# Altium PCB ESE516_PCB.PcbDoc (part 2 of 2)
Units mil, origin at the board's own origin, x right, y up, seen from the top; angles counter-clockwise.
Board outline 3149.61 x 3149.61 mil, 4 copper layers (Top Layer, GroundPlane, PowerPlane, Bottom Layer), stack 58.4 mil thick; 100 components, 68 nets, 304 pads, 8 vias.
Unrouted connection lines stored in the file: 178.
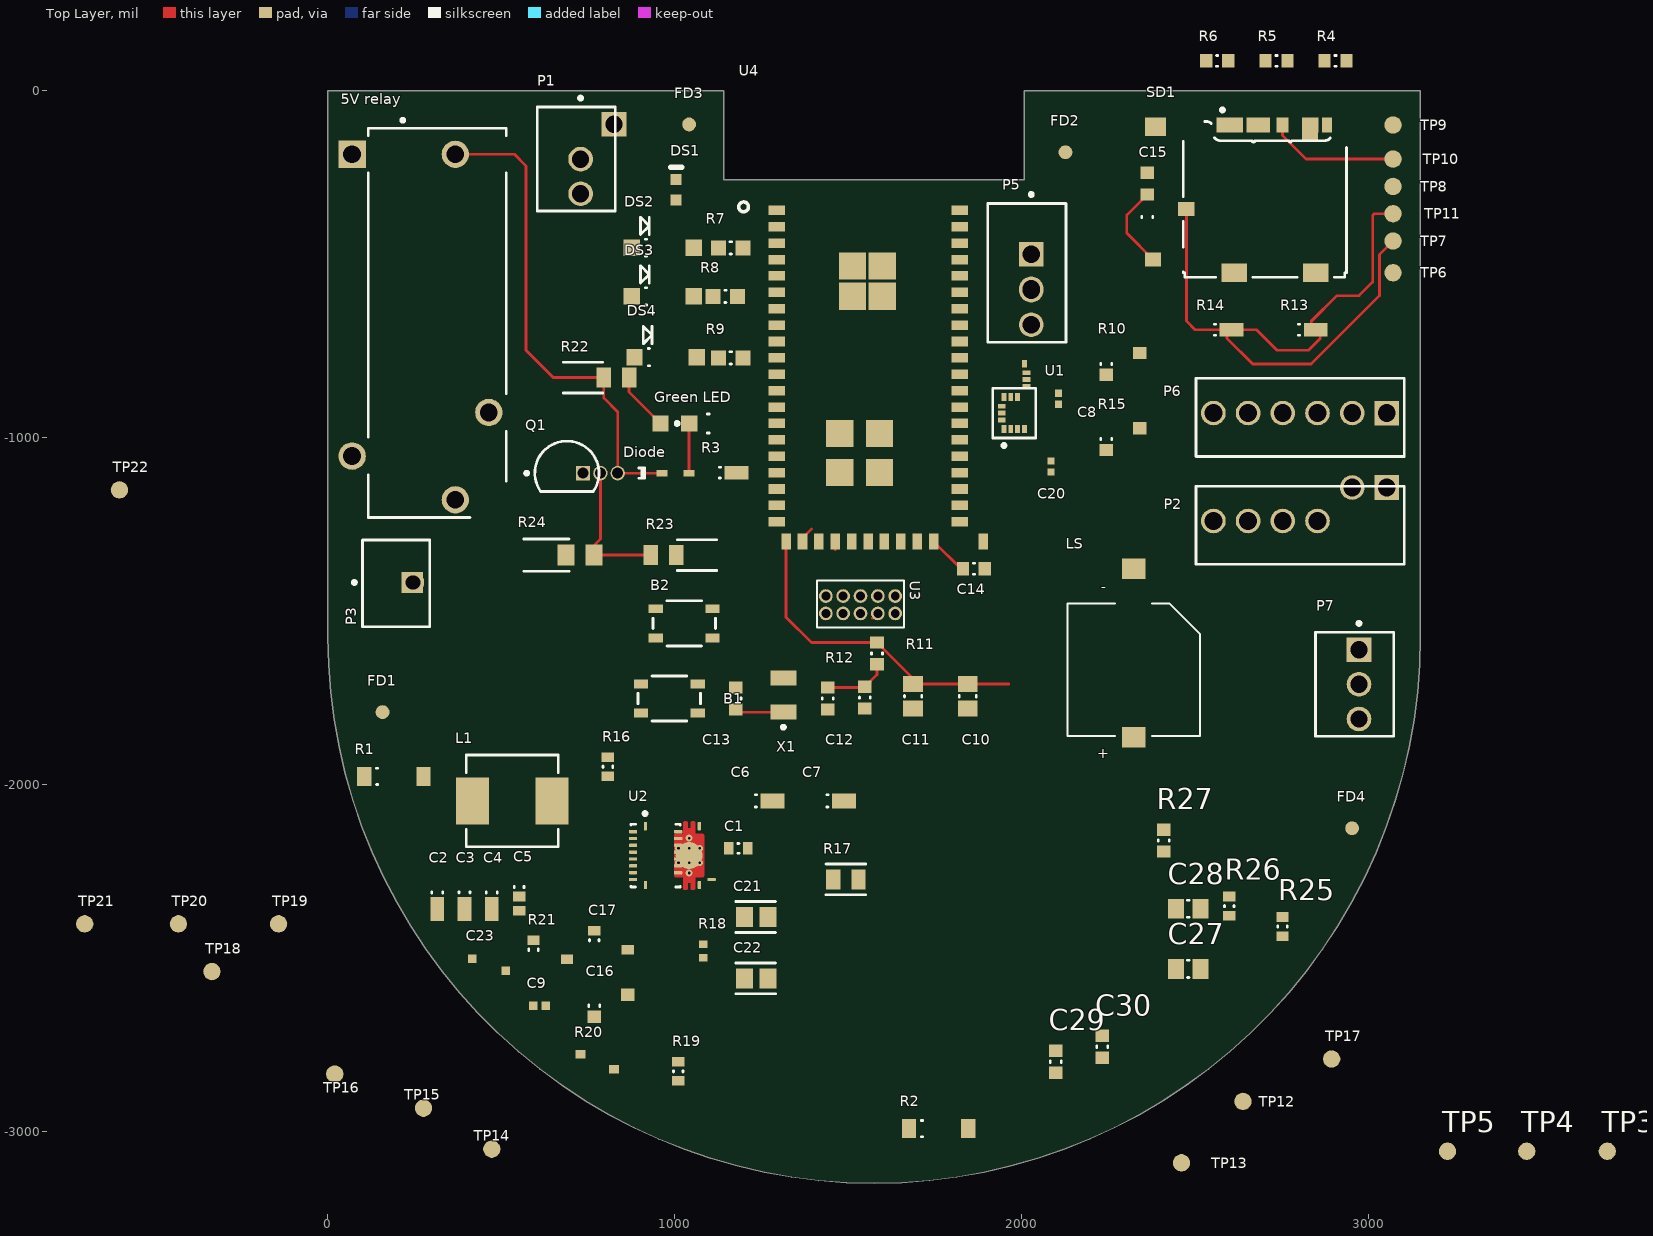
[diagram p0: Top Layer view]

## Part data (continued)
X1: library part CMP-0447-00001-2, "Crystal, 32.768 kHz, 12.5 pF, -40 to 85 degC, SMD Low Profile 3.2 x 1.5 x 0.9 mm, Tape and Reel", Equivalent Series Resistance (R1)="70 Kohm", Frequency="32.768 kHz", Frequency Tolerance @+25degC="+/- 20 ppm", Insulation Resistance (Min)="500 Mohm", Load Capacitance (CL)="12.5 pF", Manufacturer=Abracon, Operating Temperature="-40 to 85 degC", Q Value (Type)=30000, Shunt Capacitance (C0)="0.9 to 1.2 pF", ComponentLink1Description="Manufacturer URL", ComponentLink1URL=http://www.abracon.com/, ComponentLink2Description=Datasheet, ComponentLink2URL=http://www.abracon.com/Resonators/ABS07.pdf, ComponentLink3Description="Package Specification", ComponentLink3URL=http://www.abracon.com/Resonators/ABS07.pdf, DatasheetVersion=04.03.13, Drive Level (Type)="0.1 uW", Mounting Technology="Surface Mount", Operation Mode="Flexural Mode (Tuning Fork)", PackageDescription="2-Pin Hand Drawn, Body 3.2x1.5mm, Pitch 2.5mm", PackageReference=ABS07-2, Packing="Tape and Reel", PartNumber=ABS07-32.768KHz-T

## Via types
v1: diameter 19.68, hole 7.87, Top Layer to Bottom Layer, 8 vias

## Nets (pads, with @x,y where several pads share a name; then routed paths per layer and width w, separated by ;. In a path a pad name is that pad's centre, name@x,y a point inside that pad or via, vN(x,y) a via of type N, cw(c..) or ccw(c..) an arc to the next point about the centre after c; other vN are vias at no path point)
3V3: "5V relay.A1" "Green LED.2" C8.1 C15.2 C20.1 Diode.1 P2.1 P5.2 R1.2 R3.1 R10.2 R13.2 R14.2 R15.2 SD1.4 TP4.1 TP6.1 U1.5 U1.8 | length 447.1
  Top Layer w8: Diode.1 1041.31,-959.02 ; R14.2 2677.17,-688.98 2736.22,-748.03 2826.45,-748.03 2860.85,-713.63 2860.85,-692.69 R13.2
12V: P3.2 R2.2 TP5.1
Battery_Status_LED: U4.36
Buzzer_GPIO: LS.P TP19.1 U4.22 | length 46.3
  Top Layer w8: U4.22 1368.14,-1289.37 1393.92,-1263.59
Camera_SERCOM3_UART_RX: P2.3 U4.14
Camera_SERCOM3_UART_TX: P2.4 U4.15
Device_Status_LED: U4.27
EP1: P7.1 U4.41
EP2: P7.2 U4.40
EP3: P7.3 U4.35
EP4: P6.1 U4.34
EP5: P6.2 U4.28
EP6: P6.3 U4.23
EP7: P6.4 U4.19
EP8: P6.5 U4.18
EP9: P6.6 U4.13
Extra_Button_GPIO: TP22.1 U4.9
FB_TPS62: R25.1 R27.2 TP17.1
FLASH_MEM_SPI_SS: R13.1 SD1.2 TP11.1 U4.37 | length 503.2
  Top Layer w8: R13.1 2834.85,-685.26 2834.85,-664.32 2908.62,-590.55 2972.44,-590.55 3011.81,-551.18 3011.81,-359.02 3016.5,-354.33 TP11.1
GND: "5V relay.11" B1.3 B1.4 C2.1 C3.1 C4.1 C5.1 C6.1 C7.1 C8.2 C10.1 C11.1 C12.1 C13.1 C14.1 C15.1 C16.2 C17.1 C20.2 C21.2 C22.2 C23.1 C27.1 C28.1 C30.1 DS2.2 DS3.2 DS4.2 LS.N P1.1 P2.2 P5.1 Q1.1 R20.1 R21.1 R24.1 R27.1 SD1.6 SD1.10 SD1.11 SD1.12 TP3.1 TP13.1 U1.6 U1.7 U2.11 U2.12 U2.20 U2.21 U3.3 U3.5 U3.9 U4.0 U4.1 U4.10 U4.17 U4.20 U4.32 U4.42 U4.51 | length 242.7
  Top Layer w8: C15.1 2303.15,-358.27 2303.15,-410.79 SD1.10
  other v1: 1041.31,-2254.92 1010.79,-2225.39 1041.31,-2225.39 1071.82,-2225.39 1010.79,-2184.06 1041.31,-2184.06 1071.82,-2184.06 1041.31,-2154.53
IMU_I2C_SCL: P5.3 R15.1 TP20.1 U1.13 U4.38
IMU_I2C_SDA: P5.4 R10.1 TP21.1 U1.14 U4.39
MCU_LED: DS1.2 U4.16
MCU_RESET: C12.2 R11.1 R12.2 TP16.1 U3.10 U4.24 | length 210.5
  Top Layer w8: C12.2 1545.51,-1720.47 R12.2 1582.74,-1683.24 R11.1 ; U4.24@1462.63,-1322.83 U4.24
MEM_SPI_CLK: R6.2 SD1.5 TP10.1 | length 377.5
  Top Layer w8: SD1.5 2751.97,-128.92 2819.9,-196.85 TP10.1
MEM_SPI_MISO: R5.2 SD1.7 TP9.1
MEM_SPI_MOSI: R4.2 SD1.3 TP8.1
"Net5V relay_14": "5V relay.14" P3.1 | length 4.7
  Top Layer w8: 367.36,-1179.13 372.05,-1179.13
"Net5V relay_A2": "5V relay.A2" Diode.2 Q1.3 R22.1 | length 1425.3
  Top Layer w8: 367.36,-183.07 537.4,-183.07 570.87,-216.54 570.87,-748.03 649.61,-826.77 R22.1 795.39,-885.83 835.4,-925.84 Q1.3 Diode.2
NetB1_1: B1.1 B1.2 R12.1
NetC1_1: C1.1 L1.2 R16.2 U2.4 U2.5 U2.6 U2.7
NetC1_2: C1.2 U2.8
NetC6_2: C6.2 C7.2 U2.1 U2.2
NetC9_1: C9.1 C23.2
NetC9_2: C9.2 R19.2 U2.18
NetC16_1: C16.1 U2.10
NetC17_2: C17.2 R19.1
NetC21_1: C21.1 C22.1 R17.1 R18.2 U2.14 U2.15 U2.16
NetC29_1: C29.1
NetC29_2: C29.2
NetDS1_1: DS1.1 R3.2
NetDS2_1: DS2.1 R7.2
NetDS3_1: DS3.1 R8.2
NetDS4_1: DS4.1 R9.1
"NetGreen LED_1": "Green LED.1" R22.2 | length 169.7
  Top Layer w8: R22.2 868.26,-868.65 958.63,-959.02
NetL2_1: 
NetQ1_2: Q1.2 R23.2 R24.2 | length 404.1
  Top Layer w8: Q1.2 785.4,-1292.27 769.72,-1307.95 769.72,-1338.58 R23.2
NetR16_1: R16.1 U2.3
NetR18_1: R18.1 R20.2 U2.17
NetR21_2: R21.2 U2.19
PG_TPS62: R26.2
SD_CARD_DETECT: R14.1 SD1.9 TP7.1 | length 1198.6
  Top Layer w8: SD1.9 2475,-663.98 2500,-688.98 R14.1 2592.33,-692.69 2592.33,-713.63 2666.1,-787.4 2834.65,-787.4 3031.5,-590.55 3031.5,-472.44 TP7.1
SERCOM1_PAD2_SPI_MISO: R5.1 U4.8
SERCOM1_PAD2_SPI_MOSI: R4.1 U4.11
SERCOM1_PAD3_SPI_SCK: R6.1 U4.12
SERCOM4_UART_RX_CLI: U4.44
SERCOM4_UART_TX_CLI: U4.43
Solenoid_GPIO: R23.1 U4.31
SS_TPS62: C30.2
SWCLK: TP15.1 U3.4 U4.25 | length 7.1
  Top Layer w8: 1569.8,-1520.75 U3.4@1574.8,-1515.75
SWDIO: TP14.1 U3.2 U4.26 | length 9.8
  Top Layer w8: U4.26@1557.12,-1309.06 U4.26
VBAT: C2.2 C3.2 C4.2 C5.2 C27.2 L1.1 P1.3 TP18.1 U2.9
VOUT: R2.1 R17.2
VOUT_TPS62: C28.2 R1.1 R25.2 R26.1
VSAMW25: C10.2 C11.2 R11.2 TP12.1 U3.1 U4.7 U4.21 | length 948.8
  Top Layer w8: U4.21 1320.9,-1517.75 1393.7,-1590.55 R11.2 1687.04,-1694.85 C11.2 C10.2 1962.63,-1710.06
Wifi_Status_LED: U4.33
XIN_32: C13.2 U4.29 X1.1 | length 141.1
  Top Layer w8: C13.2 1183.1,-1791.34 X1.1
XOUT_32: C14.2 U4.30 X1.2 | length 117.2
  Top Layer w8: U4.30 1824.84,-1377.95 C14.2
pads on no net: "5V relay.12" B2.1 B2.2 B2.3 B2.4 FD1. FD2. FD3. FD4. P1.2 P2.5 P2.6 R7.1 R8.1 R9.2 SD1.1 SD1.8 SD1.13 SD1.14 U1.1 U1.2 U1.3 U1.4 U1.9 U1.10 U1.11 U1.12 U2.13 U3.6 U3.7 U3.8 U4.2 U4.3 U4.4 U4.5 U4.6 U4.45 U4.46 U4.47 U4.48 U4.49 U4.50

## Polygon pours and split planes (outlines as drawn)
GND on GroundPlane "GND_L02_P001" (solid, pour order 1): 39.37,-59.06 1122.05,-59.06 1122.05,-275.59 2027.56,-275.59 2027.56,-59.06 3129.92,-59.06 3110.24,-78.74 3110.24,-1619.16 3071.57,-1950.4 2708.66,-2587.83 1536.63,-3103.94 610.86,-2752.04 288.98,-2357.19 98.03,-1969.53 39.37,-1732.28

## Silkscreen, mask and mechanical layers (free items; w line width, h text height)
Mechanical 13:
  the board outline again, w10

## Text inside footprints (layer, text, board x,y; h text height)
LS: Top Overlay "+" at 2251.97,-1897.61 h30 r180; Top Overlay "-" at 2244.09,-1421.23 h30 r180; Mechanical 13 "+" at 2251.97,-1897.61 h30 r180; Mechanical 13 "-" at 2244.09,-1421.23 h30 r180